# Altium PCB Breath-2.PcbDoc
Units mil, origin at the board's own origin, x right, y up, seen from the top; angles counter-clockwise.
Board outline 973.44 x 1050 mil, 2 copper layers (Top Layer, Bottom Layer); 7 components, 6 nets, 24 pads, 0 vias.
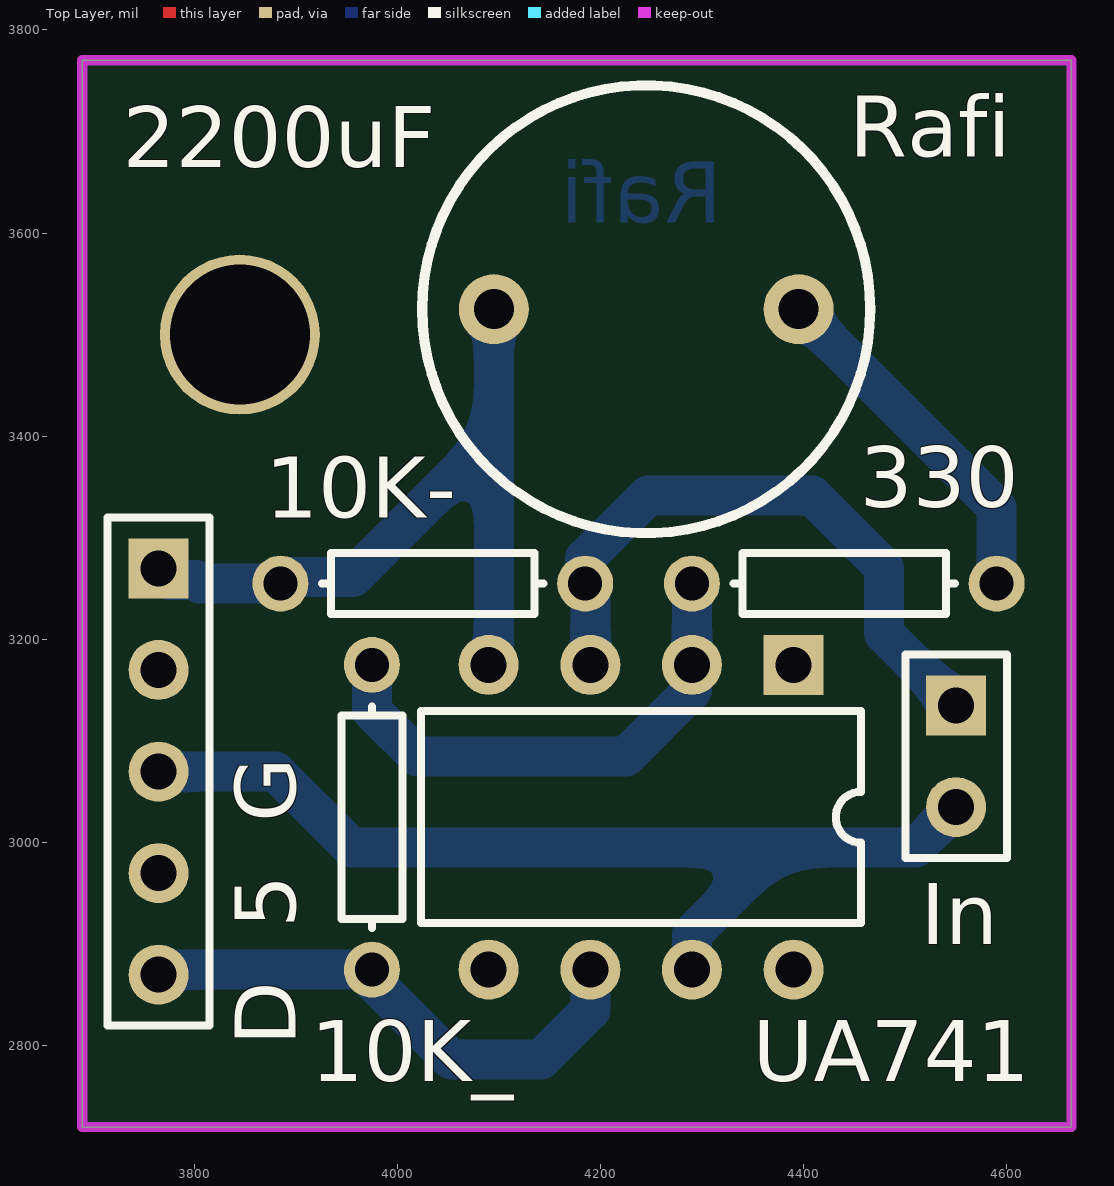
[diagram p0: Top Layer view]
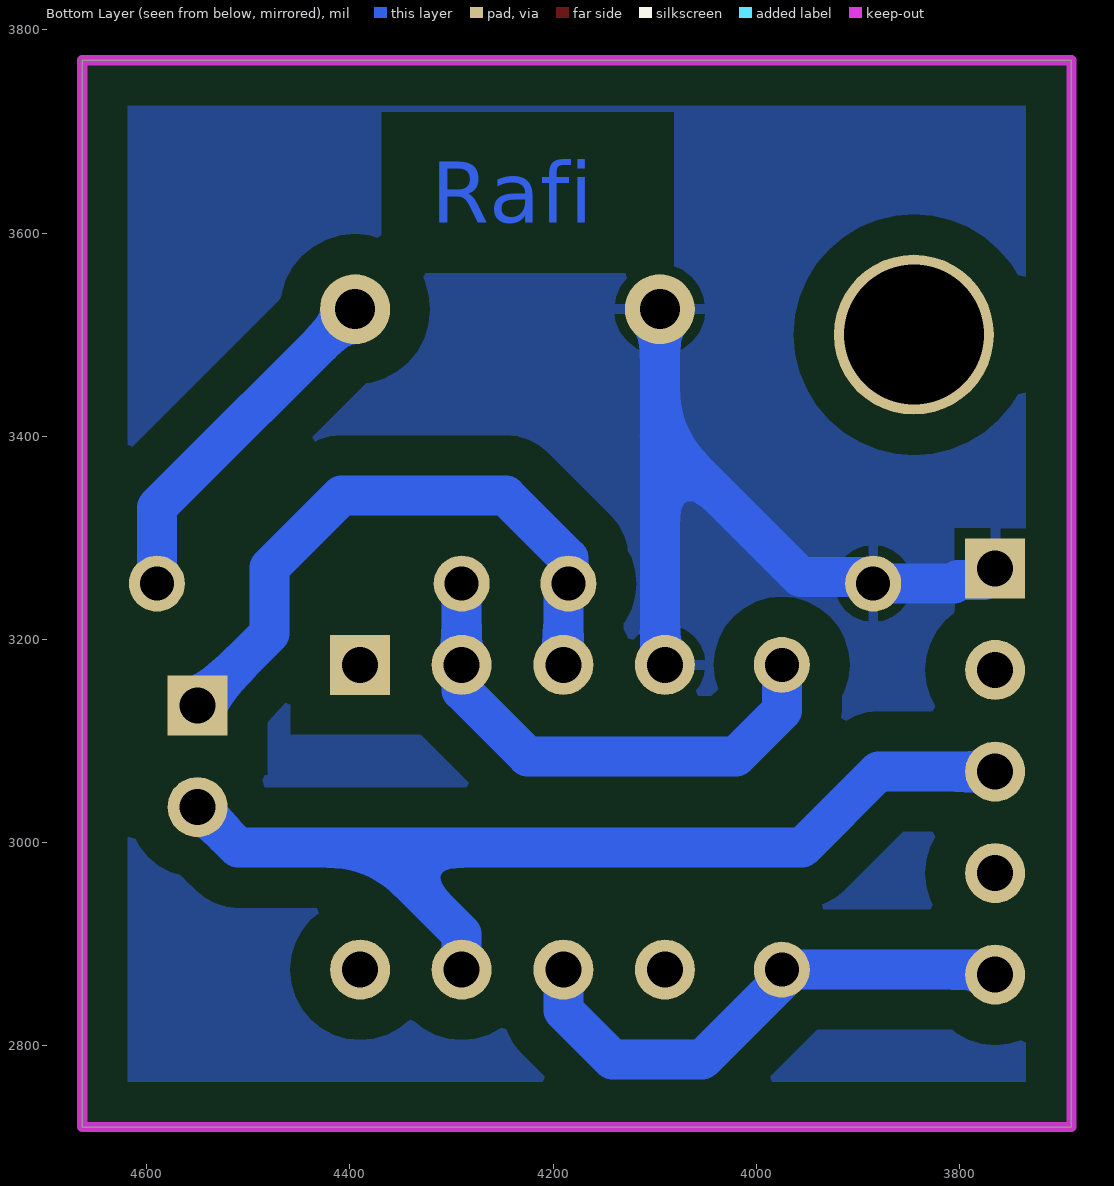
[diagram p1: Bottom Layer view, seen from below]

## Layer stack, top to bottom
Top Solder: solder mask 0.4, Solder Resist, Dk 3.5
Top Layer: signal copper 1.4
Dielectric 1: dielectric 12.6, FR-4, Dk 4.8
Bottom Layer: signal copper 1.4
Bottom Solder: solder mask 0.4, Solder Resist, Dk 3.5

## Board outline
3690,2720 3690,3770 4663.44,3770 4663.44,2720

## Design rules (kind name [scope] priority, off if disabled: settings)
Clearance [All] p1: gap=39.37
PolygonConnect [All] p1: connectstyle=Relief reliefconductorwidth=10 reliefentries=4 polygonreliefangle="90 Angle" airgapwidth=10
RoutingVias [All] p1: holewidth=28 width=50 viastyle="Through Hole" minholewidth=28 minwidth=50 maxholewidth=28 maxwidth=50
SolderMaskExpansion [All] p1: expansion=4
Width [All] p1: maxlimit=39.37 minlimit=39.37 preferedwidth=39.37
30 further rules are at their usual default settings.

## Components (designator, comment, footprint, x,y, rotation, side; value= is the part's Value field where it differs from the comment)
10K- "10K" AXIAL-0.3 4035,3255 r180 top (schematic designator 10K-2)
10K_ "10K" AXIAL-0.3 3975,3025 r90 top (schematic designator "10K Juga")
330 "330" AXIAL-0.3 4440,3255 r180 top (schematic designator 330-2)
2200uF "2200uF" RAD-0.3 4245,3525 r180 top
"D  5  G" "Header 5" HDR1X5 3765,3270 r270 top (schematic designator Out)
In "Input" HDR1X2 4550,3135 r270 top (schematic designator PPP)
UA741 "UA741CN" DIP8 4240,3025 r180 top (schematic designator UA741CN)

## Footprints (in the part's own frame and the unit in brackets; to place one, negate y for a bottom-side part, rotate by r counter-clockwise, add the part's x,y. Pads: shape width x height; smd on the part's side, far side on the other; paste and mask are expansions set on the pad)
AXIAL-0.3 [mm] "Axial Device, Thru-Hole; 2 Leads; 0.3 in Pin Spacing"
  round 1.4 hole 0.85: 1(-3.81,0) 2(3.81,0)
  silkscreen extent -2.77,-0.76 2.77,0.76
DIP8 [mm] "DIP; 8 Leads; Row Spacing 7.62 mm; Pitch 2.54 mm"
  rect 1.5x1.5 hole 0.9: 1(-3.81,-3.81)
  round 1.5 hole 0.9: 2(-1.27,-3.81) 3(1.27,-3.81) 4(3.81,-3.81) 5(3.81,3.81) 6(1.27,3.81) 7(-1.27,3.81) 8(-3.81,3.81)
  silkscreen extent -5.5,-2.65 5.5,2.65
HDR1X2 [mm] "Connector; Header; 2 Position"
  rect 1.5x1.5 hole 0.9: 1(0,0)
  round 1.5 hole 0.9: 2(2.54,0)
  silkscreen extent -1.27,-1.27 3.81,1.27
HDR1X5 [mm] "Connector; Header; 5 Position"
  rect 1.5x1.5 hole 0.9: 1(0,0)
  round 1.5 hole 0.9: 2(2.54,0) 3(5.08,0) 4(7.62,0) 5(10.16,0)
  silkscreen extent -1.27,-1.27 11.43,1.27
RAD-0.3 [mm] "Radial Cap, Thru-Hole; 2 Leads; 0.3 in Pin Spacing"
  round 1.75 hole 1: 1(-3.81,0) 2(3.81,0)

## Part data
10K- 10K_ 330: library part Res1, "Resistor"
2200uF: library part Cap, "Capacitor"
"D  5  G": "Header, 5-Pin"
In: library part "Header 2", "Header, 2-Pin"
UA741: "General-Purpose Single Operational Amplifier"

## Free pads (board coordinates)
  round 157.48 hole 137.8: 8(3845,3500)

## Nets (pads, with @x,y where several pads share a name; then routed paths per layer and width w, separated by ;. In a path a pad name is that pad's centre, name@x,y a point inside that pad or via, vN(x,y) a via of type N, cw(c..) or ccw(c..) an arc to the next point about the centre after c; other vN are vias at no path point)
+5: "D  5  G.3" In.2 UA741.7 | length 987.8
  Bottom Layer w39.37: 3765,3070 3880,3070 3955,2995 4375,2995 ; UA741.7 4290,2910 4375,2995 ; In.2 4510,2995 4375,2995
GND: 10K-.2 2200uF.2 "D  5  G.1" UA741.4 | length 873.3
  Bottom Layer w39.37: 3765,3270 3776.42,3258.58 3801.69,3258.58 3805.27,3255 10K-.2 3891.61,3261.61 3956.61,3261.61 4095,3400 2200uF.2 4095,3180 UA741.4
"Net10K Juga_1": 10K_.1 "D  5  G.5" UA741.6 | length 529.9
  Bottom Layer w39.37: 3765,2870 3770,2875 10K_.1 3975,2864.73 4053.31,2786.42 4141.42,2786.42 4190,2835 UA741.6
"Net10K Juga_2": 10K_.2 330.2 UA741.2 | length 510.7
  Bottom Layer w39.37: 10K_.2 3975,3130 4020,3085 4225.27,3085 4290,3149.73 UA741.2 330.2
Net10K-2_1: 10K-.1 In.1 UA741.3 | length 621.3
  Bottom Layer w39.37: UA741.3 4190,3250 10K-.1 4185,3280 4246.61,3341.61 4408.39,3341.61 4479,3271 4479,3206 In.1
Net330-2_1: 330.1 2200uF.1 | length 350.8
  Bottom Layer w39.37: 2200uF.1 4590,3330 330.1
pads on no net: "D  5  G.2" "D  5  G.4" UA741.1 UA741.5 UA741.8

## Polygon pours and split planes (outlines as drawn)
GND on Bottom Layer "Bottom Layer-GND" (solid, pour order 3): 3690,2720 4663.44,2720 4663.44,3770 3690,3770 3690,2720

## Keep-outs
Keep-Out Layer:
  the board outline again, w10

## Other copper
Bottom Layer:
  text "Rafi" at 4320,3610 h60

## Silkscreen, mask and mechanical layers (free items; w line width, h text height)
Top Overlay:
  circle w10: c4245,3525 r220.47
  text "Rafi" at 4445,3675 h60